# Altium PCB FEV-60_12V_Module.PcbDoc
Units mil, origin at the board's own origin, x right, y up, seen from the top; angles counter-clockwise.
Board outline 2805 x 2100 mil, 2 copper layers (Top Layer, Bottom Layer); 35 components, 22 nets, 116 pads, 42 vias.
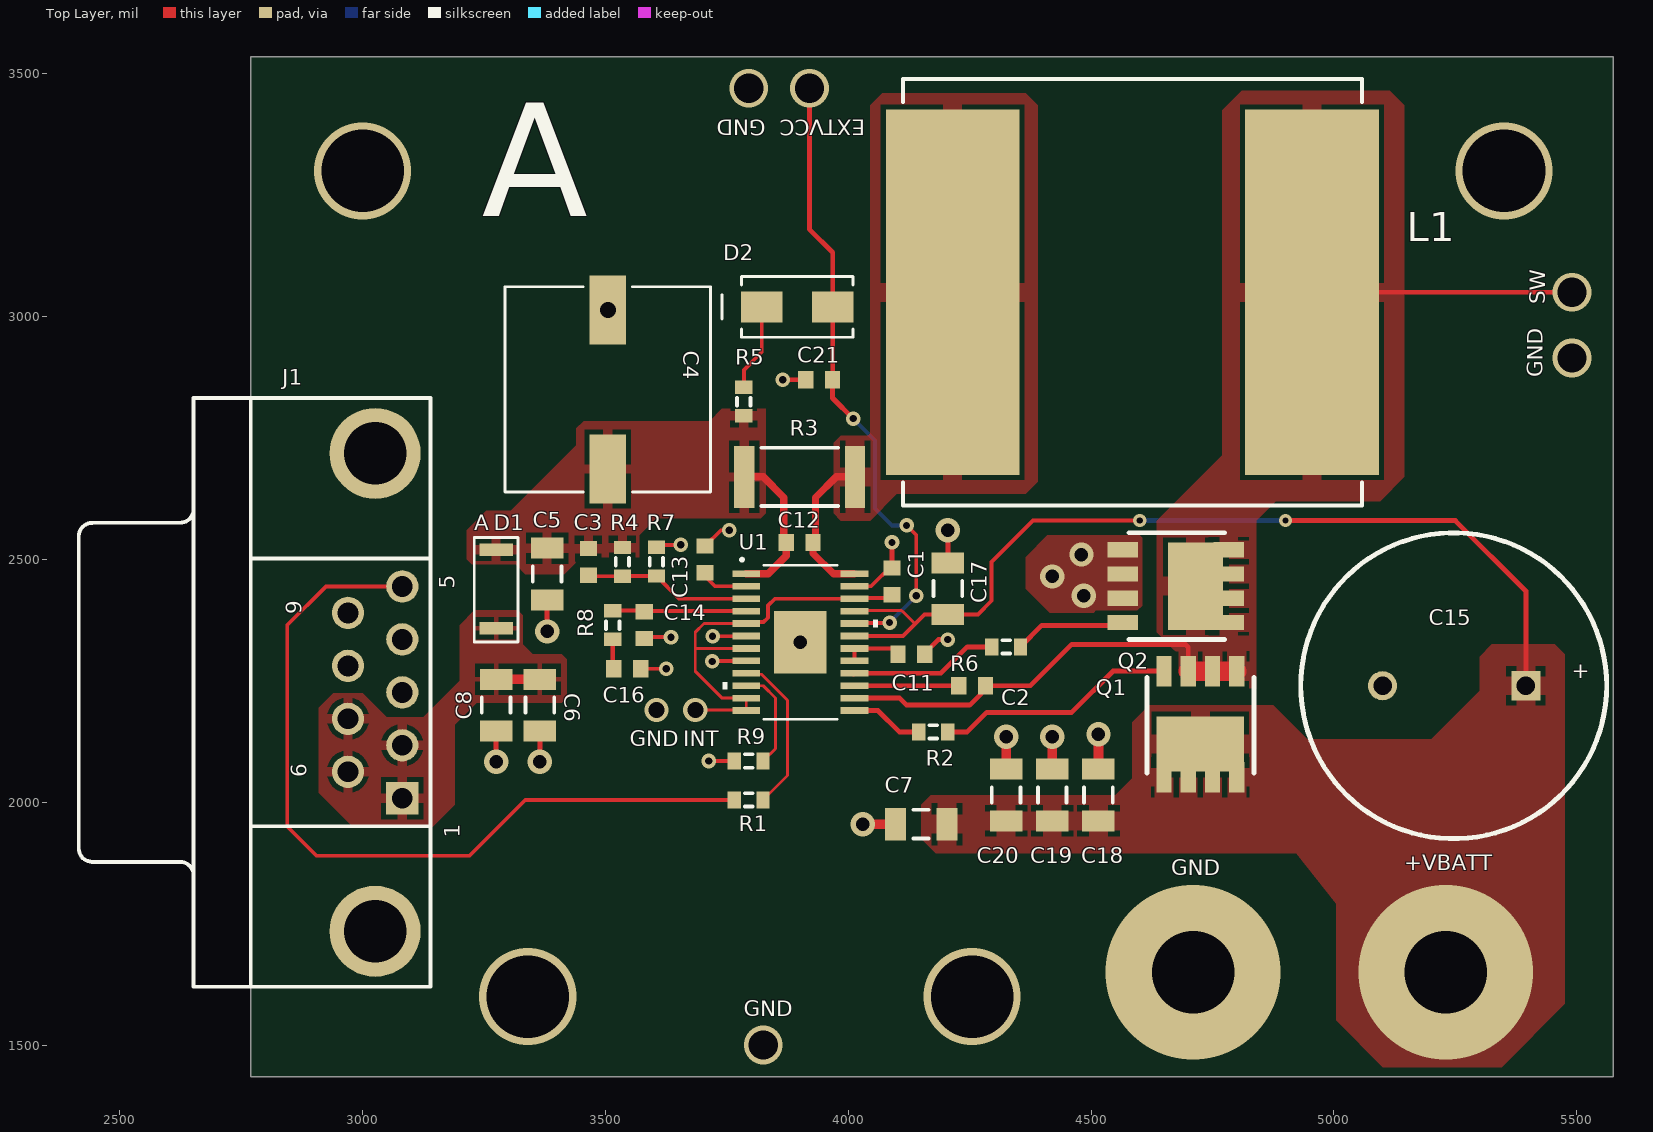
[diagram p0: Top Layer view]
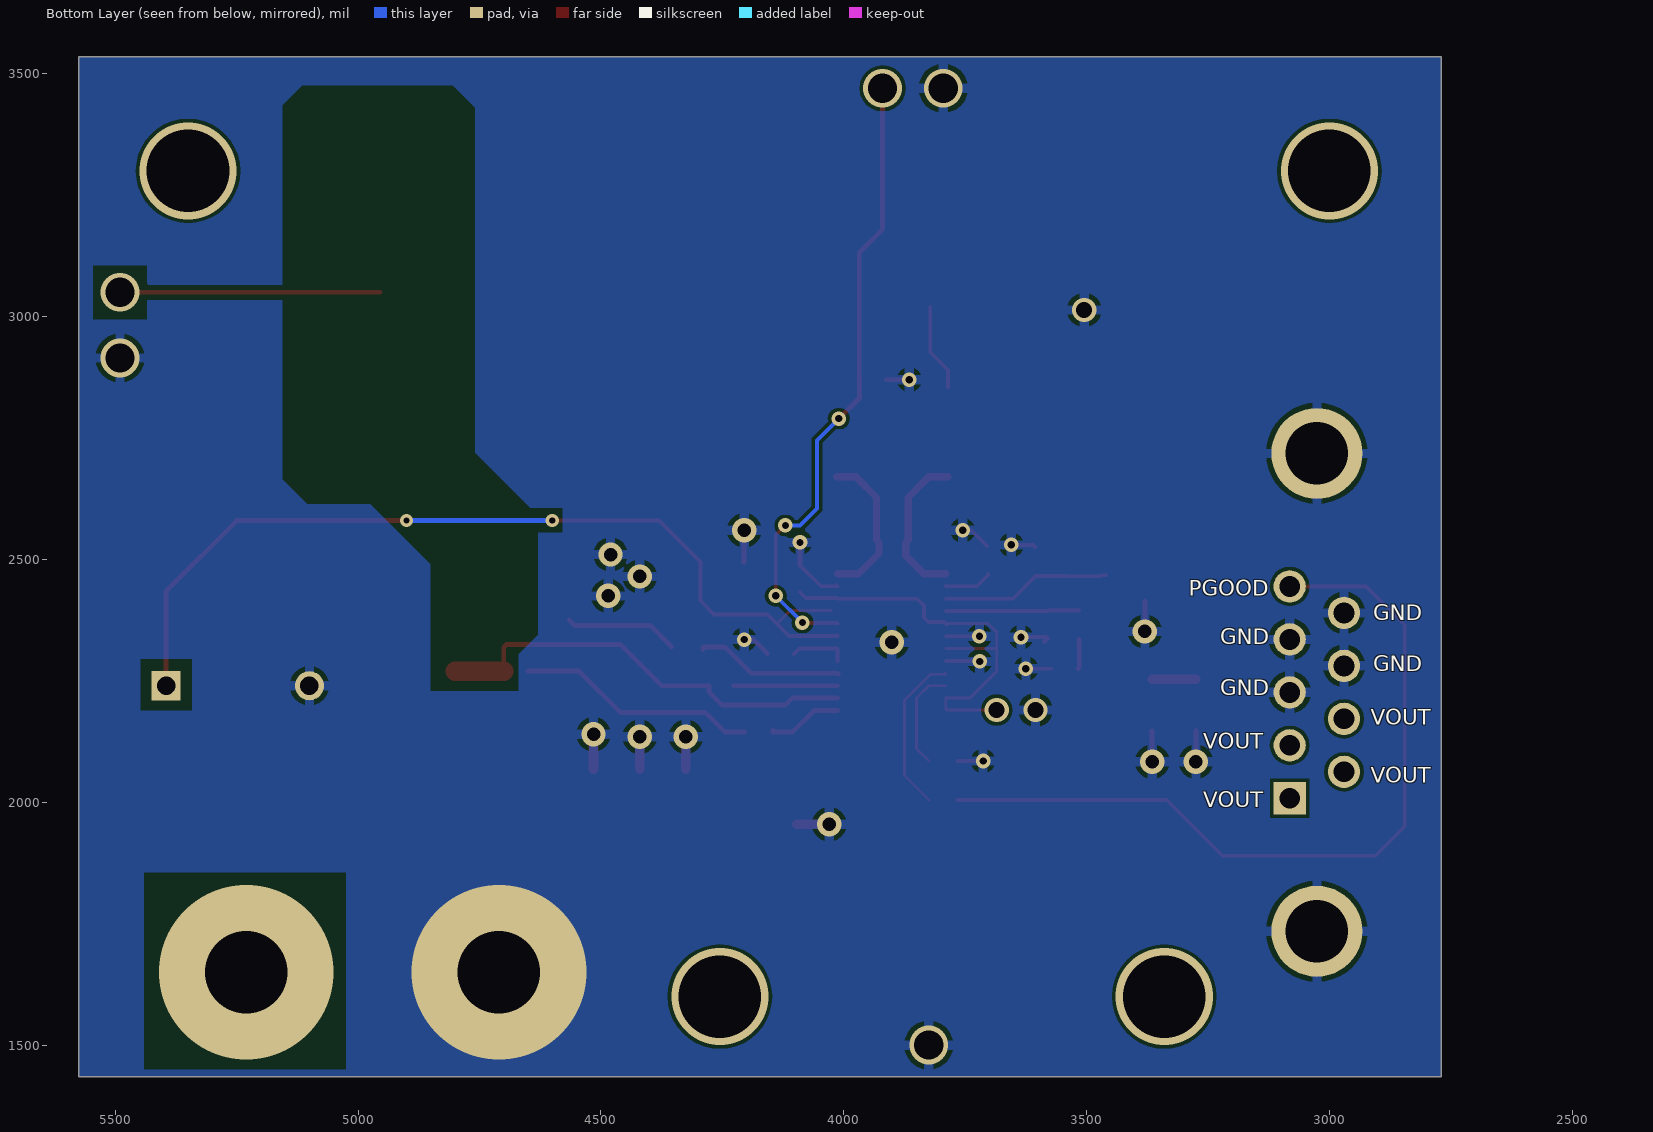
[diagram p1: Bottom Layer view, seen from below]

## Layer stack, top to bottom
Top Solder: solder mask 0.4, Solder Resist, Dk 3.5
Top Layer: signal copper 1.4
Dielectric 1: dielectric 12.6, FR-4, Dk 4.8
Bottom Layer: signal copper 1.4
Bottom Solder: solder mask 0.4, Solder Resist, Dk 3.5

## Board outline
2770,1435 2770,3535 5575,3535 5575,1435

## Design rules (kind name [scope] priority, off if disabled: settings)
Clearance Clearance_1 [InNamedPolygon('GND_Pour')] p1: gap=10 ignorepadtopadclearanceinfootprint=FALSE except(0: Arc-Hole Track-Hole SMDPad-Hole THPad-Hole Via-Hole Fill-Hole Poly-Hole Region-Hole Text-Hole; 30: Arc-Via Track-Via)
Clearance [All] p2: gap=7 ignorepadtopadclearanceinfootprint=FALSE
HoleSize [All] p1: absolutevalues=TRUE maxlimit=160 minlimit=8 maxpercent=80.000 minpercent=20.000
MinimumAnnularRing [All] p1: minimumring=7
MinimumSolderMaskSliver [All] p1: minsoldermaskwidth=3.5
PolygonConnect Sense--40Relief [All vs IsNamedPolygon('Top Layer-Sense-')] p1: connectstyle=Relief reliefconductorwidth=20 reliefentries=4 polygonreliefangle="90 Angle" airgapwidth=10
PolygonConnect Vbatt-40Relief [All vs IsNamedPolygon('Top Layer-VBatt')] p2: connectstyle=Relief reliefconductorwidth=40 reliefentries=4 polygonreliefangle="90 Angle" airgapwidth=10
PolygonConnect Sense+-40Relief [All vs IsNamedPolygon('Top Layer-Sense+')] p3: connectstyle=Relief reliefconductorwidth=40 reliefentries=4 polygonreliefangle="90 Angle" airgapwidth=10
PolygonConnect SW-40Relief [All vs IsNamedPolygon('Top Layer-SW')] p4: connectstyle=Relief reliefconductorwidth=40 reliefentries=4 polygonreliefangle="90 Angle" airgapwidth=10
PolygonConnect PolygonConnect_11 [All vs IsNamedPolygon('Top Layer-SW')] p5: thpad.connectstyle=Relief thpad.reliefconductorwidth=10 thpad.reliefentries=4 thpad.polygonreliefangle="90 Angle" thpad.airgapwidth=10 smdpad.connectstyle=Relief smdpad.reliefconductorwidth=40 smdpad.reliefentries=4 smdpad.polygonreliefangle="90 Angle" smdpad.airgapwidth=10 via.connectstyle=Relief via.reliefconductorwidth=10 via.reliefentries=4 via.polygonreliefangle="90 Angle" via.airgapwidth=10
PolygonConnect PolygonConnect_8 [All vs IsNamedPolygon('Top Layer-GND')] p6: connectstyle=Direct reliefconductorwidth=10 reliefentries=4 polygonreliefangle="90 Angle" airgapwidth=10
PolygonConnect PolygonConnect_9 [All vs IsNamedPolygon('Top Layer-SW')] p7: connectstyle=Direct reliefconductorwidth=10 reliefentries=4 polygonreliefangle="90 Angle" airgapwidth=10
PolygonConnect PolygonConnect_10 [All vs IsNamedPolygon('Vout_Pour')] p8: connectstyle=Direct reliefconductorwidth=10 reliefentries=4 polygonreliefangle="90 Angle" airgapwidth=10
PolygonConnect PolygonConnect_7 [All vs IsNamedPolygon('Bot Layer-SW')] p9: connectstyle=Direct reliefconductorwidth=10 reliefentries=4 polygonreliefangle="90 Angle" airgapwidth=10
PolygonConnect PolygonConnect_5 [All vs IsNamedPolygon('Top Layer-VBatt')] p10: connectstyle=Direct reliefconductorwidth=10 reliefentries=4 polygonreliefangle="90 Angle" airgapwidth=10
PolygonConnect PolygonConnect_6 [All vs IsNamedPolygon('GND_Pour')] p11: thpad.connectstyle=Relief thpad.reliefconductorwidth=25 thpad.reliefentries=4 thpad.polygonreliefangle="90 Angle" thpad.airgapwidth=10 smdpad.connectstyle=Relief smdpad.reliefconductorwidth=10 smdpad.reliefentries=4 smdpad.polygonreliefangle="90 Angle" smdpad.airgapwidth=10 via.connectstyle=Relief via.reliefconductorwidth=25 via.reliefentries=4 via.polygonreliefangle="90 Angle" via.airgapwidth=10
PolygonConnect PolygonConnect_1 [All vs IsNamedPolygon('SW_Pour')] p12: thpad.connectstyle=Relief thpad.reliefconductorwidth=10 thpad.reliefentries=4 thpad.polygonreliefangle="90 Angle" thpad.airgapwidth=10 smdpad.connectstyle=Direct smdpad.reliefconductorwidth=10 smdpad.reliefentries=4 smdpad.polygonreliefangle="90 Angle" smdpad.airgapwidth=10 via.connectstyle=Relief via.reliefconductorwidth=10 via.reliefentries=4 via.polygonreliefangle="90 Angle" via.airgapwidth=10
PolygonConnect PolygonConnect_2 [All vs IsNamedPolygon('VBatt_Pour')] p13: connectstyle=Direct reliefconductorwidth=10 reliefentries=4 polygonreliefangle="90 Angle" airgapwidth=10
PolygonConnect PolygonConnect_3 [All vs IsNamedPolygon('Q2_GND_Pour')] p14: connectstyle=Direct reliefconductorwidth=10 reliefentries=4 polygonreliefangle="90 Angle" airgapwidth=10
PolygonConnect PolygonConnect_4 [All vs IsNamedPolygon('R8_L1_Sense+_Pour')] p15: thpad.connectstyle=Relief thpad.reliefconductorwidth=10 thpad.reliefentries=4 thpad.polygonreliefangle="90 Angle" thpad.airgapwidth=10 smdpad.connectstyle=Direct smdpad.reliefconductorwidth=10 smdpad.reliefentries=4 smdpad.polygonreliefangle="90 Angle" smdpad.airgapwidth=10 via.connectstyle=Relief via.reliefconductorwidth=10 via.reliefentries=4 via.polygonreliefangle="90 Angle" via.airgapwidth=10
PolygonConnect [All] p16: thpad.connectstyle=Relief thpad.reliefconductorwidth=20 thpad.reliefentries=4 thpad.polygonreliefangle="90 Angle" thpad.airgapwidth=10 smdpad.connectstyle=Relief smdpad.reliefconductorwidth=10 smdpad.reliefentries=4 smdpad.polygonreliefangle="90 Angle" smdpad.airgapwidth=10 via.connectstyle=Relief via.reliefconductorwidth=20 via.reliefentries=4 via.polygonreliefangle="90 Angle" via.airgapwidth=10
RoutingVias [All] p1: holewidth=28 width=50 viastyle="Through Hole" minholewidth=10 minwidth=20 maxholewidth=28 maxwidth=50
SilkToSilkClearance [All] p1: silktosilkclearance=3.5
SilkToSolderMaskClearance [IsPad] p1: minsilkscreentomaskgap=3.5 clearancetoexposedcopper=TRUE
SolderMaskExpansion [All] p1: expansion=4
Width [All] p1: maxlimit=110 minlimit=6 preferedwidth=10 bottomlayer_maxwidth=10 minimp=50.000000 maximp=50.000000 favimp=50.000000
26 further rules are at their usual default settings.

## Components (designator, comment, footprint, x,y, rotation, side; value= is the part's Value field where it differs from the comment)
C1 "Cap Semi" 1608[0603] 4090,2455 r270 top value=0.1uF
C2 "Cap Semi" 1608[0603] 4255,2240 r180 top value=1uF
C3 "Cap Semi" 1608[0603] 3465,2495 r90 top value="10pF (OPT)"
C4 "50THV100M10X10.5" CAP_J-V_10X10P5 3505,2850 r90 top value=100uF
C5 "Cap Semi" C1206 3380,2470 r90 top value=10uf
C6 "Cap Semi" C1206 3365,2200 r90 top value=10uF
C7 "Cap Semi" C1206 4150,1955 r0 top value=0.1uF
C8 "Cap Semi" C1206 3275,2200 r90 top value=10uF
C11 "Cap Semi" 1608[0603] 4130,2305 r180 top value=4.7uF
C12 "Cap Semi" 1608[0603] 3900,2535 r0 top value=1000pF
C13 "Cap Semi" 1608[0603] 3705,2500 r270 top value=1000pF
C14 "Cap Semi" 1608[0603] 3580,2365 r90 top value=100pF
C15 "UCS2D151MHD1TN" UCS2D151MHD1TN 5245,2410 r180 top value=150uF
C16 "Cap Semi" 1608[0603] 3545,2275 r180 top value=3300pF
C17 "Cap Semi" C1206 4205,2440 r270 top value=0.1uF
C18 "Cap Semi" C1206 4515,2015 r270 top value=0.1uF
C19 "Cap Semi" C1206 4420,2015 r270 top value=0.1uF
C20 "Cap Semi" C1206 4325,2015 r270 top value=0.1uF
C21 "Cap Semi" 1608[0603] 3940,2870 r0 top value=4.7uF
D1 "CMS05(TE12L,Q,M)" CMS05(TE12L,Q,M) 3275,2520 r270 top
D2 "D Zener" SMA 3895,3020 r0 top
J1 "D Connector 9" DSUB1.385-2H9 2651.89,2226.42 r90 top
L1 "PA4349.473ANLT" PA4349.473ANLT 4585,3050 r180 top value=47uH
Q1 "TPH2900ENH" TPH2900ENH 4800,2270 r270 top
Q2 "TPH2900ENH" TPH2900ENH 4565,2520 r0 top
R1 "Res3" J1-0603 3795,2005 r180 top value=1k
R2 "Res3" J1-0603 4175,2145 r0 top value=5
R3 "6m" RESC2512(6432)_L 3900,2670 r180 top value="1.50 Ohm"
R4 "Res3" J1-0603 3535,2495 r90 top value=806K
R5 "Res3" J1-0603 3785,2825 r270 top value=22
R6 "Res3" J1-0603 4325,2320 r0 top value=5
R7 "Res3" J1-0603 3605,2495.47 r270 top value=28K
R8 "Res3" J1-0603 3515,2365 r90 top value=23.7K
R9 "Res3" J1-0603 3795,2085 r0 top value=75K
U1 "LTC7801EFE" LTC7801 3901.22,2329.57 r0 top locked value=Value

## Footprints (in the part's own frame and the unit in brackets; to place one, negate y for a bottom-side part, rotate by r counter-clockwise, add the part's x,y. Pads: shape width x height; smd on the part's side, far side on the other; paste and mask are expansions set on the pad)
1608[0603] [mm] "Chip Capacitor, Body 1.6x0.8mm, IPC High Density"
  rect 0.8x0.9 smd: 1(-0.7,0) 2(0.7,0)
  body extent -0.87,-0.48 0.87,0.48, height 1.3
C1206 [mm] "Chip Capacitor, Body 3.2x1.6mm, IPC High Density"
  rect 1.1x1.7 smd: 1(-1.35,0) 2(1.35,0)
  silkscreen extent -0.4,-0.75 0.4,0.75, body extent -1.7,-0.9 1.7,0.9, height 1.3
CAP_J-V_10X10P5 [mil]
  rect 142x75 smd paste+0 mask+0: 1(-163.5,0) 2(163.5,0)
  silkscreen extent -212,-212 212,212, body extent -214,-206 214,207, height 415
CMS05(TE12L,Q,M) [mm]
  rect 0.65x1.75 smd: 1(4.1,0) 2(0,0)
  silkscreen extent -0.64,-1.14 4.83,1.14
DSUB1.385-2H9 [mm] "Connector; D Subminiature; 9 Position; Right Angle; Pitch 1.385 mm"
  rect 1.69x1.69 hole 1.09: 1(-5.54,-10.92)
  round 1.69 hole 1.09: 2(-2.77,-10.92) 3(0,-10.92) 4(2.77,-10.92) 5(5.54,-10.92) 6(-4.155,-8.08) 7(-1.385,-8.08) 8(1.385,-8.08) 9(4.155,-8.08)
  round 4.76 hole 3.26: 10(-12.495,-9.5) 11(12.495,-9.5)
  silkscreen extent -15.4,-12.4 15.4,6
J1-0603 [mm] "Chip Resistor, Body 1.6x0.8mm, IPC High Density"
  rect 0.7x0.9 smd: 1(-0.75,0) 2(0.75,0)
  silkscreen extent -0.2,-0.35 0.2,0.35, body extent -0.85,-0.48 0.85,0.48, height 0.9
LTC7801 [mm]
  rect 1.461x0.351 smd: 1(-2.825,3.575) 2(-2.825,2.925) 3(-2.825,2.275) 4(-2.825,1.625) 5(-2.825,0.975) 6(-2.825,0.325) 7(-2.825,-0.325) 8(-2.825,-0.975) 9(-2.825,-1.625) 10(-2.825,-2.275) 11(-2.825,-2.925) 12(-2.825,-3.575) 13(2.825,-3.575) 14(2.825,-2.925) 15(2.825,-2.275) 16(2.825,-1.625) 17(2.825,-0.975) 18(2.825,-0.325) 19(2.825,0.325) 20(2.825,0.975) 21(2.825,1.625) 22(2.825,2.275) 23(2.825,2.925) 24(2.825,3.575)
  rect 2.74x3.25 smd paste-1.612: 25(0,0)
  silkscreen extent -4.06,-4.03 4.06,4.39, body extent -3.2,-3.9 3.2,3.9, height 1.2
PA4349.473ANLT [mm] "Precision Wire Wound Inductor, Body 23.50x21.00mm, IPC Medium Density"
  rect 7x19.1 smd: 1(-9.398,0) 2(9.398,0)
  silkscreen extent -12,-11.15 12,11.15, body extent -12,-11.15 12,11.15, height 13
RESC2512(6432)_L [mm] "Chip Resistor, Body 6.4x3.2mm, IPC High Density"
  rect 1.05x3.25 smd: 1(-2.9,0) 2(2.9,0)
  silkscreen extent -2,-1.52 2,1.53, body extent -3.25,-1.7 3.25,1.7, height 0.75
SMA [mm]
  rect 2.18x1.63 smd: 1(-1.857,0) 2(1.857,0)
  silkscreen extent -3.94,-1.59 2.92,1.59, body extent -2.79,-1.46 2.8,1.46, height 2.35
TPH2900ENH [mm]
  rect 2.873x4.572 smd: 1(3.81,-1.905)
  rect 1.6x0.8 smd: 1(5.546,-1.27) 1(5.546,0) 1(5.546,-3.81) 1(5.546,-2.54) 2(0,-3.81) 3(0,0) 3(0,-1.27) 3(0,-2.54)
  silkscreen extent 0.33,-4.7 5.33,0.89
UCS2D151MHD1TN [mil] "Radial Cap 50% Protection"
  rect 60x60 hole 38: 1(-150,170)
  round 60 hole 38: 2(145,170)
  silkscreen extent -317,-145 313,485

## Part data
C1 C2 C3 C5 C6 C7 C8 C11 C12 C13 C14 C16 C17 C18 C19 C20 C21: "Capacitor (Semiconductor SIM Model)", LatestRevisionDate=29-May-2009, LatestRevisionNote="IPC-7351 Footprint Added.", PackageDescription="Chip Capacitor", PackageReference=C1206, Published=8-Jun-2000, Publisher="Altium Limited"
C4 C15: library part "Cap Pol3", "Polarized Capacitor (Surface Mount)", ComponentLink1Description=Digikey, LatestRevisionDate=29-May-2009, LatestRevisionNote="IPC-7351 Footprint Added.", PackageDescription="Chip Capacitor", PackageReference=C0805, Published=8-Jun-2000, Publisher="Altium Limited"
  C4: ComponentLink1URL=https://www.digikey.com/product-detail/en/nichicon/UVY1V101MED1TD/493-12937-1-ND/4328554
  C15: ComponentLink1URL=https://www.digikey.com/product-detail/en/nichicon/UCY2C151MHD9TO/493-13302-1-ND/4333061
D1: library part "Diode 10TQ035", "Schottky Rectifier", Manufacturer=Toshiba, ComponentLink1Description="Manufacturer Link", ComponentLink1URL=http://www.irf.com/, ComponentLink2Description=Datasheet, ComponentLink2URL=http://www.irf.com/product-info/datasheets/data/10tq.pdf, DatasheetVersion=PD-2.057B, LatestRevisionDate=17-Jul-2002, LatestRevisionNote="Re-released for DXP Platform.", Note="Terminal 2 is the TAB and is electrically connected to the cathode", PackageDescription="TO, Thru-Hole, Vertical, Heatsink Mounted; 3 In-Line Leads (1 Absent); Pitch 2.54 mm", PackageReference=TO-220AC, PackageVersion=Feb-1998, Part Number=CMS05(TE12L,Q,M), Published=8-Jun-2000, Publisher="Altium Limited"
D2: "Zener Diode", LatestRevisionDate=17-Jul-2002, LatestRevisionNote="Re-released for DXP Platform.", PackageDescription="Diode, Thru-Hole; 2 Leads; 0.7 in Pin Spacing", PackageReference=DIODE-0.7, Published=8-Jun-2000, Publisher="Altium Limited"
J1: "Receptacle Assembly, 9 Position, Right Angle", PackageDocument=O, DatasheetDocument=1-Sep-1999, Gender=Receptacle, LatestRevisionDate=17-Jul-2002, LatestRevisionNote="Re-released for DXP Platform.", Orientation="Right Angle", PackageReference=788750, Positions=9, Published=15-Jun-2001, Publisher="Altium Limited"
L1: library part Inductor, "Inductor", Code_IEC=1005, Code_JEITA=0402, LatestRevisionDate=29-May-2009, LatestRevisionNote="IPC-7351 Footprint Added.", PackageDescription="Chip Inductor", PackageReference=0402-A, Published=8-Jun-2000, Publisher="Altium Limited"
Q1 Q2: "N-Channel 200V 33A (Ta) 78W (Tc) Surface Mount 8-SOP Advance (5x5)", Manufacturer=Toshiba, Part Number=TPH2900ENHL1QCT-ND, ComponentLink1Description=TPH2900ENH, ComponentLink1URL=https://www.digikey.com/product-detail/en/toshiba-semiconductor-and-storage/TPH2900ENHL1Q/TPH2900ENHL1QCT-ND/5456291
R1 R2 R4 R5 R6 R7 R8 R9: "Resistor", LatestRevisionDate=29-May-2009, LatestRevisionNote="IPC-7351 Footprint Added.", PackageDescription="Chip Resistor", PackageReference=J1-0603, Published=8-Jun-2000, Publisher="Altium Limited"
R3: library part CMP-1018-00006-1, "2512", Case-Metric=6432, Manufacturer="Rohm Semiconductor", Part Number=PMR100HZPFU6L00, Power="1 W", Tolerance="5 %", Case-EIA=2512, Technology=SMT
U1: "Buck Regulator Positive Output Step-Down DC-DC Controller IC 24-TSSOP", Manufacturer="Analog Devices", Part Number=LTC7801EFE#PBF, Copyright="Copyright (C) 2018 Accelerated Designs. All rights reserved", RefDes=RefDes, Type=DEV

## Via types
v1: diameter 30, hole 15, Top Layer to Bottom Layer, 14 vias
v2: diameter 50, hole 28, Top Layer to Bottom Layer, 12 vias
v3: diameter 80, hole 60, Top Layer to Bottom Layer, 5 vias
v4: diameter 200, hole 170, Top Layer to Bottom Layer, 4 vias
v5: diameter 50, hole 33, Top Layer to Bottom Layer, 3 vias
v6: diameter 360, hole 170, Top Layer to Bottom Layer, 2 vias
v7: diameter 27, hole 13, Top Layer to Bottom Layer, tented both sides, 2 vias

## Nets (pads, with @x,y where several pads share a name; then routed paths per layer and width w, separated by ;. In a path a pad name is that pad's centre, name@x,y a point inside that pad or via, vN(x,y) a via of type N, cw(c..) or ccw(c..) an arc to the next point about the centre after c; other vN are vias at no path point)
BG: R6.1 U1.16 | length 308.3
  Top Layer w10: U1.16@4010.54,2263.68 U1.16 4190.59,2265.59 4245,2320 4290,2320 R6.1@4290,2314.53
BOOST: C2.2 U1.15 | length 215
  Top Layer w10: U1.15 4172.44,2240 C2.2
EXTVCC: C21.2 D2.2 U1.20 | length 1305.4
  Top Layer w8: U1.20 4013.46,2368.98 4083.98,2368.98 v1(4085,2370) ; v1(4120,2570) 4140,2550 v1(4140,2425)
  Top Layer w10: v3(3920,3470) 3920,3180 3968.12,3131.88 D2.2 3968.12,2870.56 C21.2 3967.56,2832.44 v1(4010,2790)
  Bottom Layer w8: v1(4010,2790) 4055,2745 4055,2605 4090,2570 v1(4120,2570) ; v1(4085,2370) v1(4140,2425)
GND: C1.1 C4.2 C5.1 C6.1 C7.1 C8.1 C11.1 C13.1 C14.1 C15.2 C16.1 C17.1 C18.1 C19.1 C20.1 C21.1 J1.3 J1.4 J1.8 J1.9 J1.10 J1.11 Q2.3 R7.1 R9.1 U1.6 U1.8 U1.23 U1.25 | length 1212.9
  Top Layer w8: C16.1 v1(3625,2275) ; C14.1 3582.56,2340 v1(3635,2340) ; R7.1 3610,2530 v1(3655,2530) ; C13.1 3737.44,2560 v1(3755,2560) ; v1(3713.03,2085) R9.1 ; v1(3720,2290) 3720.59,2290.59 3789.41,2290.59 U1.8 ; v1(3720.68,2341.86) U1.6@3789.5,2341.86 ; U1.23@4015.35,2447.63 U1.23 4047.17,2444.72 C1.1@4090,2487.56
  Top Layer w10: v2(3275,2083.7) C8.1 ; v2(3365,2083.7) C6.1 C6.1@3366.38,2145.47 ; v2(3380,2351.85) C5.1@3380,2415 ; C14.1 C14.1@3586.85,2330.59 ; v1(3865,2870) C21.1 ; C1.1@4090,2487.56 v1(4090,2535) ; C11.1 4157.56,2306.97 4185.59,2335 v1(4205,2335) ; C17.1 4206.85,2495 4205,2496.85 v2(4205,2560)
  Top Layer w20: v2(4030,1955) C7.1 ; C20.1 v2(4325,2135) ; C19.1 v2(4420,2135) ; C18.1 v2(4515,2140)
  other v2: 3901.22,2329.57 4485,2425 4420,2465 4480,2510
  other v3: 3825,1500 5490,2915 3795,3470
  other v5: 3605,2190 3505,3013.5
  other v6: 4710,1650
INTVCC: C1.2 U1.5 U1.7 U1.11 U1.12 U1.22 | length 897.1
  Top Layer w6: v5(3685,2190) 3788.82,2190 3790,2191.18 U1.11 3740.59,2214.41 3685,2270 3685,2316.77 ; U1.5@3788.09,2366.05 3786.19,2367.95 3702.95,2367.95 3685,2350 3685,2316.77 ; U1.7 3685,2316.77
  Top Layer w8: U1.5@3788.09,2366.05 U1.5 3792.91,2370.86 3825.86,2370.86 3835,2380 3835,2405 3849.13,2419.13 U1.22 4014,2420.69 4078.25,2420.69 C1.2@4090,2432.44
NetC11_2: C11.2 U1.17 U1.18 | length 120.5
  Top Layer w8: U1.17 U1.18 4090.69,2316.77 C11.2
NetC13_2: C13.2 U1.2 | length 99.5
  Top Layer w8: C13.2@3702.56,2470 3702.56,2468.03 3725.87,2444.72 U1.2 U1.2@3789.72,2445
NetC14_2: C14.2 R8.2 U1.4 | length 277.6
  Top Layer w8: R8.2 3578.03,2394.53 C14.2 ; C14.2@3580,2393.54 U1.4 U1.4@3788.74,2392.28
NetC16_2: C16.2 R8.1 | length 64.3
  Top Layer w10: R8.1@3516.97,2333.5 R8.1 3515,2277.44 C16.2
NetD2_1: D2.1 R5.1 | length 180.7
  Top Layer w8: R5.1 3785,2890 3821.88,2926.88 D2.1
NetJ1_5: J1.5 R1.2 | length 1677.7
  Top Layer w8: J1.5 2924.53,2444.53 2845,2365 2845,1950 2905,1890 3220,1890 3335,2005 R1.2
NetQ1_2: Q1.2 R2.2 | length 497.2
  Top Layer w10: R2.2 4245,2145 4285,2185 4460,2185 4545,2270 Q1.2
NetQ2_2: Q2.2 R6.2 | length 233.3
  Top Layer w10: R6.2 4398.78,2364.25 4554.25,2364.25 Q2.2@4565,2375
NetR1_1: R1.1 U1.9 | length 333.9
  Top Layer w6: U1.9 3791.91,2263.69 3821.31,2263.69 3875,2210 3875,2055.47 R1.1
NetR9_2: R9.2 U1.10 | length 210.9
  Top Layer w6: U1.10 3825,2240 3850,2215 3850,2110.47 R9.2
Sense+: C12.2 L1.2 R3.1 U1.24 | length 318.7
  Top Layer w15: U1.24 3969.68,2470.32 3927.56,2512.44 C12.2 3932.56,2540 3932.56,2627.56 3975,2670 R3.1
Sense-: C3.2 C4.1 C5.2 C12.1 D1.2 R3.2 R4.2 R5.2 U1.1 | length 319.2
  Top Layer w15: R3.2 3825,2670 3867.44,2627.56 3867.44,2540 C12.1 3872.44,2507.44 3835.32,2470.32 U1.1
SW: C2.1 L1.1 Q1.3 Q2.1 U1.14 | length 1439.2
  Top Layer w10: U1.14 4105.59,2214.41 4120,2200 4250,2200 4277.56,2227.56 4277.56,2240 C2.1 4375,2240 4460,2325 4694.14,2325 4700,2319.14 Q1.3@4700,2270 ; L1.1 v3(5490,3050)
  Top Layer w40: Q1.3@4700,2270 4750,2270 Q1.3@4800,2270
TG: R2.1 U1.13 | length 155.1
  Top Layer w10: U1.13 4061.18,2188.82 4105,2145 R2.1 R2.1@4145.47,2148.94
VBatt: C7.2 C15.1 C17.2 C18.2 C19.2 C20.2 Q1.1 U1.19 U1.21 | length 1912.2
  Top Layer w6: U1.21@4025,2395 4110,2395 4137.5,2367.5
  Top Layer w8: v7(4600,2580) 4380,2580 4295,2495 4295,2415 4266.85,2386.85 C17.2 4156.85,2386.85 4137.5,2367.5 4112.36,2342.36 U1.19 ; U1.19 4014.35,2344.27 U1.19
  Top Layer w10: v7(4900,2580) 5250,2580 5395,2435 C15.1
  Bottom Layer w10: v7(4600,2580) v7(4900,2580)
  other v6: 5230,1650
VFB: C3.1 R4.1 R7.2 U1.3 | length 345.2
  Top Layer w8: C3.1@3460,2467.44 C3.1 ; C3.1@3470,2467.44 3471.97,2465.47 R4.1 R4.1@3540,2465.47 ; R4.1@3540,2465.94 R7.2 3651.81,2419.13 U1.3
Vout: C6.2 C8.2 D1.1 J1.1 J1.2 J1.6 J1.7 | length 91.9
  Top Layer w6: C6.2 C6.2@3366.38,2254.53
  Top Layer w20: C8.2 C6.2
copper on no net:
  other v4: 3340,1600 4255,1600 3000,3300 5350,3300

## Polygon pours and split planes (outlines as drawn)
SW on Top Layer "Top Layer-SW" (solid, pour order 86): 4680,2235 4680,2305 4635,2350 4635,2580 4770,2715 4770,3425 4810,3465 5115,3465 5145,3435 5145,2670 5095,2620 4880,2620 4840,2580 4840,2235
Sense+ on Top Layer "Top Layer-Sense+" (solid, pour order 78): 3985,2755 4040,2755 4045,2760 4045,3435 4070,3460 4365,3460 4390,3435 4390,2660 4365,2635 4100,2635 4045,2580 3985,2580 3970,2595 3970,2740
VBatt on Top Layer "Top Layer-VBatt" (solid, pour order 76): 4150,1995 4170,2015 4550,2015 4585,2050 4585,2165 4620,2200 4875,2200 4945,2130 5200,2130 5300,2230 5300,2300 5325,2325 5455,2325 5475,2305 5475,1585 5345,1455 5100.89,1455 5005,1550.89 5005,1791.25 4922,1895 4180,1895 4150,1925
Vout on Top Layer "Top Layer-Vout" (solid, pour order 74): 2940,2225 3000,2225 3050,2175 3125,2175 3200,2250 3200,2365 3230,2395 3320,2395 3330,2385 3330,2325 3350,2305 3410,2305 3420,2295 3420,2215 3410,2205 3235,2205 3190,2160 3190,1995 3145,1950 2980,1950 2910,2020 2910,2195
Sense- on Top Layer "Top Layer-Sense-" (solid, pour order 72): 3830,2810 3830,2595 3820,2585 3605,2585 3570,2550 3570,2505 3450,2505 3415,2470 3335,2470 3315,2490 3225,2490 3215,2500 3215,2560 3255,2600 3305,2600 3440,2735 3440,2770 3455,2785 3715,2785 3740,2810
GND on Top Layer "Top Layer-GND" (solid, pour order 52): 4595,2395 4510,2395 4505,2390 4415,2390 4365,2440 4365,2505 4410,2550 4600,2550 4605,2545 4605,2405
GND on Bottom Layer (solid, pour order 88): 2770,3535 2770,1435 5575,1435 5575,3535

## Other copper
Bottom Layer:
  pour cut-out: 4670,2230 4850,2230 4850,2490 4975,2615 5105,2615 5155,2665 5155,3035 5435,3035 5435,2995 5545,2995 5545,3105 5435,3105 5435,3065 5155,3065 5155,3435 5115,3475 4805,3475 4760,3430 4760,2720 4645,2605 4579.1,2605 4579.1,2556.33 4630,2554.78 4630,2345 4670,2305
  pour cut-out: 5342.5,2190 5447.5,2190 5447.5,2295 5342.5,2295
  pour cut-out: 5025,1450 5440,1450 5440,1855 5025,1855

## Silkscreen, mask and mechanical layers (free items; w line width, h text height)
Top Overlay:
  text "GND" at 3830,3405 h32 r180
  text "EXTVCC" at 4035,3405 h32 r180
  text "A" at 3245,3130 h400
  text "SW" at 5435,3025 h32 r90
  text "GND" at 5430,2875 h32 r90
  text "+" at 5490,2255 h32
  text "GND" at 3550,2115 h32
  text "INT" at 3660,2115 h32
  text "+VBATT" at 5145,1860 h32
  text "GND" at 4665,1850 h32
  text "GND" at 3785,1560 h32
Bottom Overlay:
  text "PGOOD" at 3290,2425 h32
  text "GND" at 2910,2375 h32
  text "GND" at 3225,2325 h32
  text "GND" at 2910,2270 h32
  text "GND" at 3225,2220 h32
  text "VOUT" at 2915,2160 h32
  text "VOUT" at 3260,2110 h32
  text "VOUT" at 2915,2040 h32
  text "VOUT" at 3260,1990 h32
Mechanical 5:
  the board outline again, w10

## Text inside footprints (layer, text, board x,y; h text height)
D1: Top Overlay "A" at 3230,2560 h32
J1: Top Overlay "6" at 2885,2051.89 h32 r90; Top Overlay "9" at 2875,2386.89 h32 r90; Top Overlay "5" at 3190,2440 h32 r90; Top Overlay "1" at 3200,1926.89 h32 r90
U1: Mechanical 7 "0.03in/0.75mm" at 3708.75,2056.02 h32; Mechanical 7 "0.026in/0.65mm" at 3495,2445.02 h32; Mechanical 7 "0.307in/7.8mm" at 4107.83,2317.07 h32; Mechanical 7 "0.252in/6.4mm" at 3819.97,2653.11 h32; Mechanical 7 "0.173in/4.4mm" at 3819.97,2578.11 h32; Mechanical 7 "Alt 2 Padstyle: b229_152h76" at 3563.72,1676.02 h32; Mechanical 7 "Alt 1 Padstyle: b152_229h76" at 3563.72,1736.02 h32; Mechanical 7 "Heat Tab Padstyle: r274_325" at 3563.72,1856.02 h32; Mechanical 7 "Pin One Padstyle: r146_35" at 3588.72,1916.02 h32; Mechanical 7 "Default Padstyle: r146_35" at 3588.72,1976.02 h32; Mechanical 13 "*" at 3817.11,2430.11 h32